# Altium PCB calculator.PcbDoc
Units mm, origin at the board's own origin, x right, y up, seen from the top; angles counter-clockwise.
Board outline 152.4 x 101.6 mm, 2 copper layers (Top Layer, Bottom Layer); 20 components, 25 nets, 107 pads, 16 vias.
Unrouted connection lines stored in the file: 7.
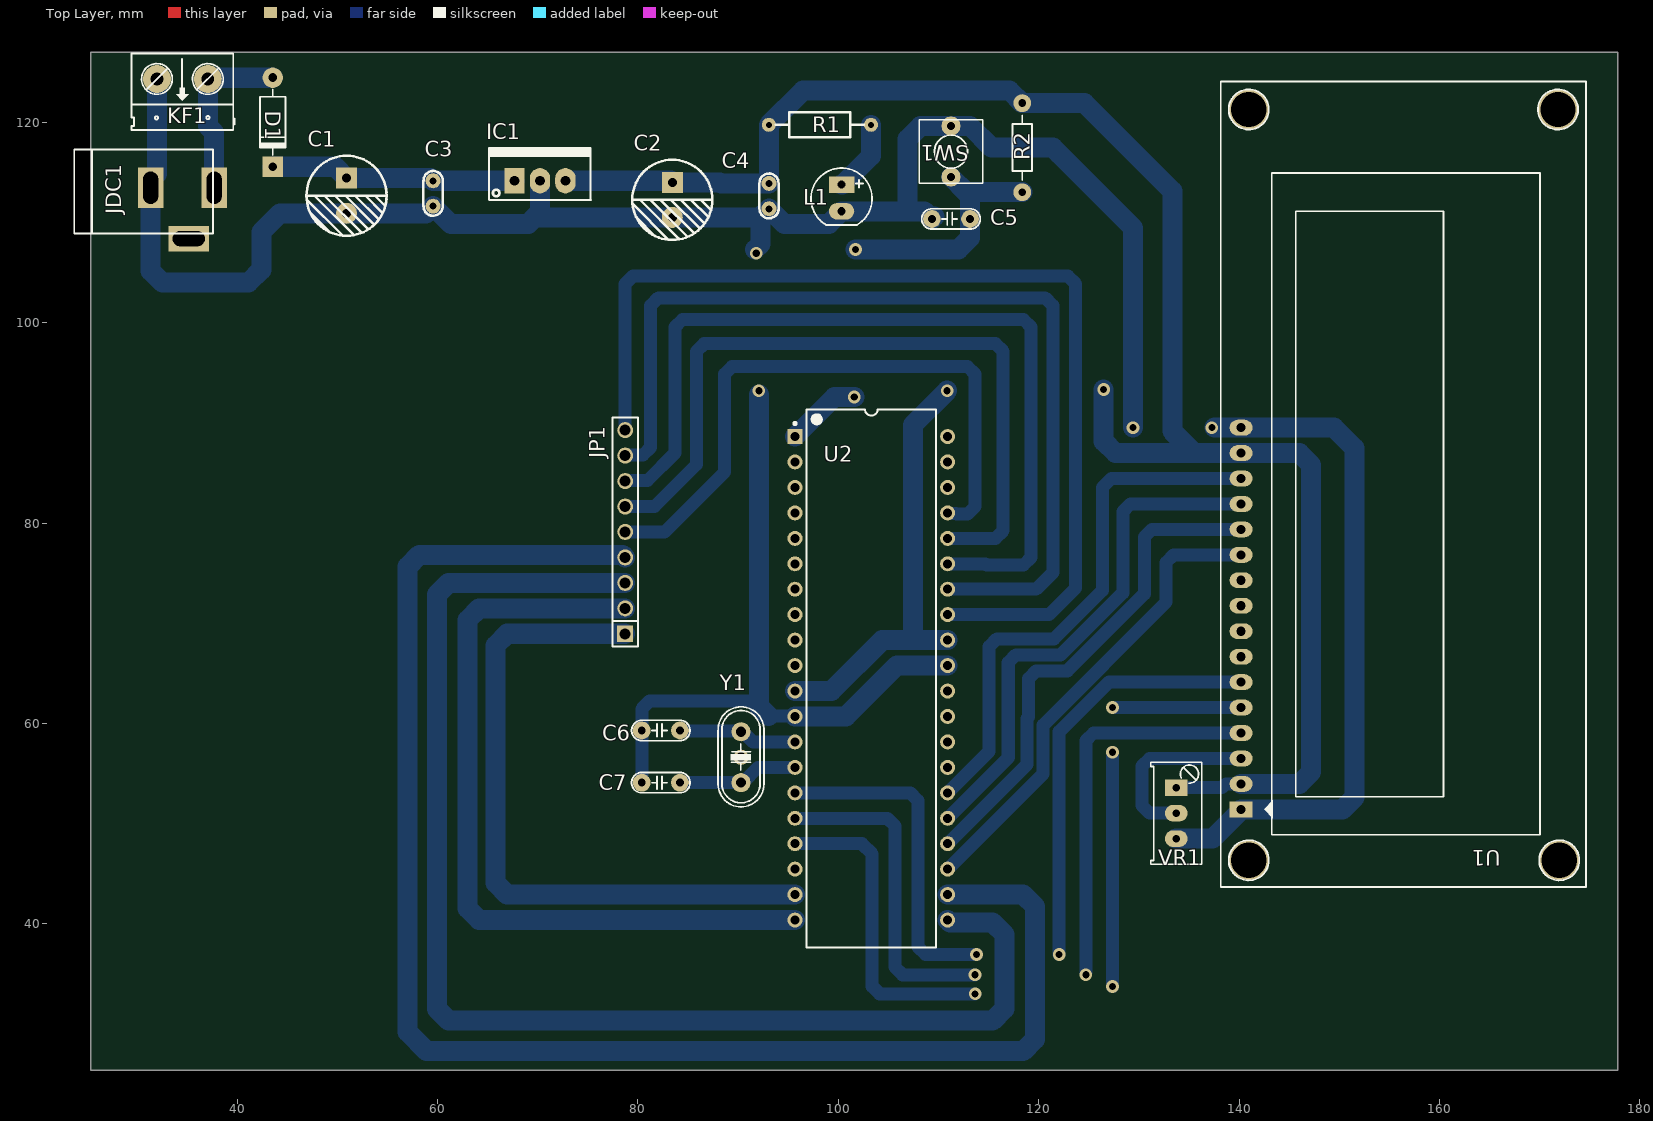
[diagram p0: Top Layer view]
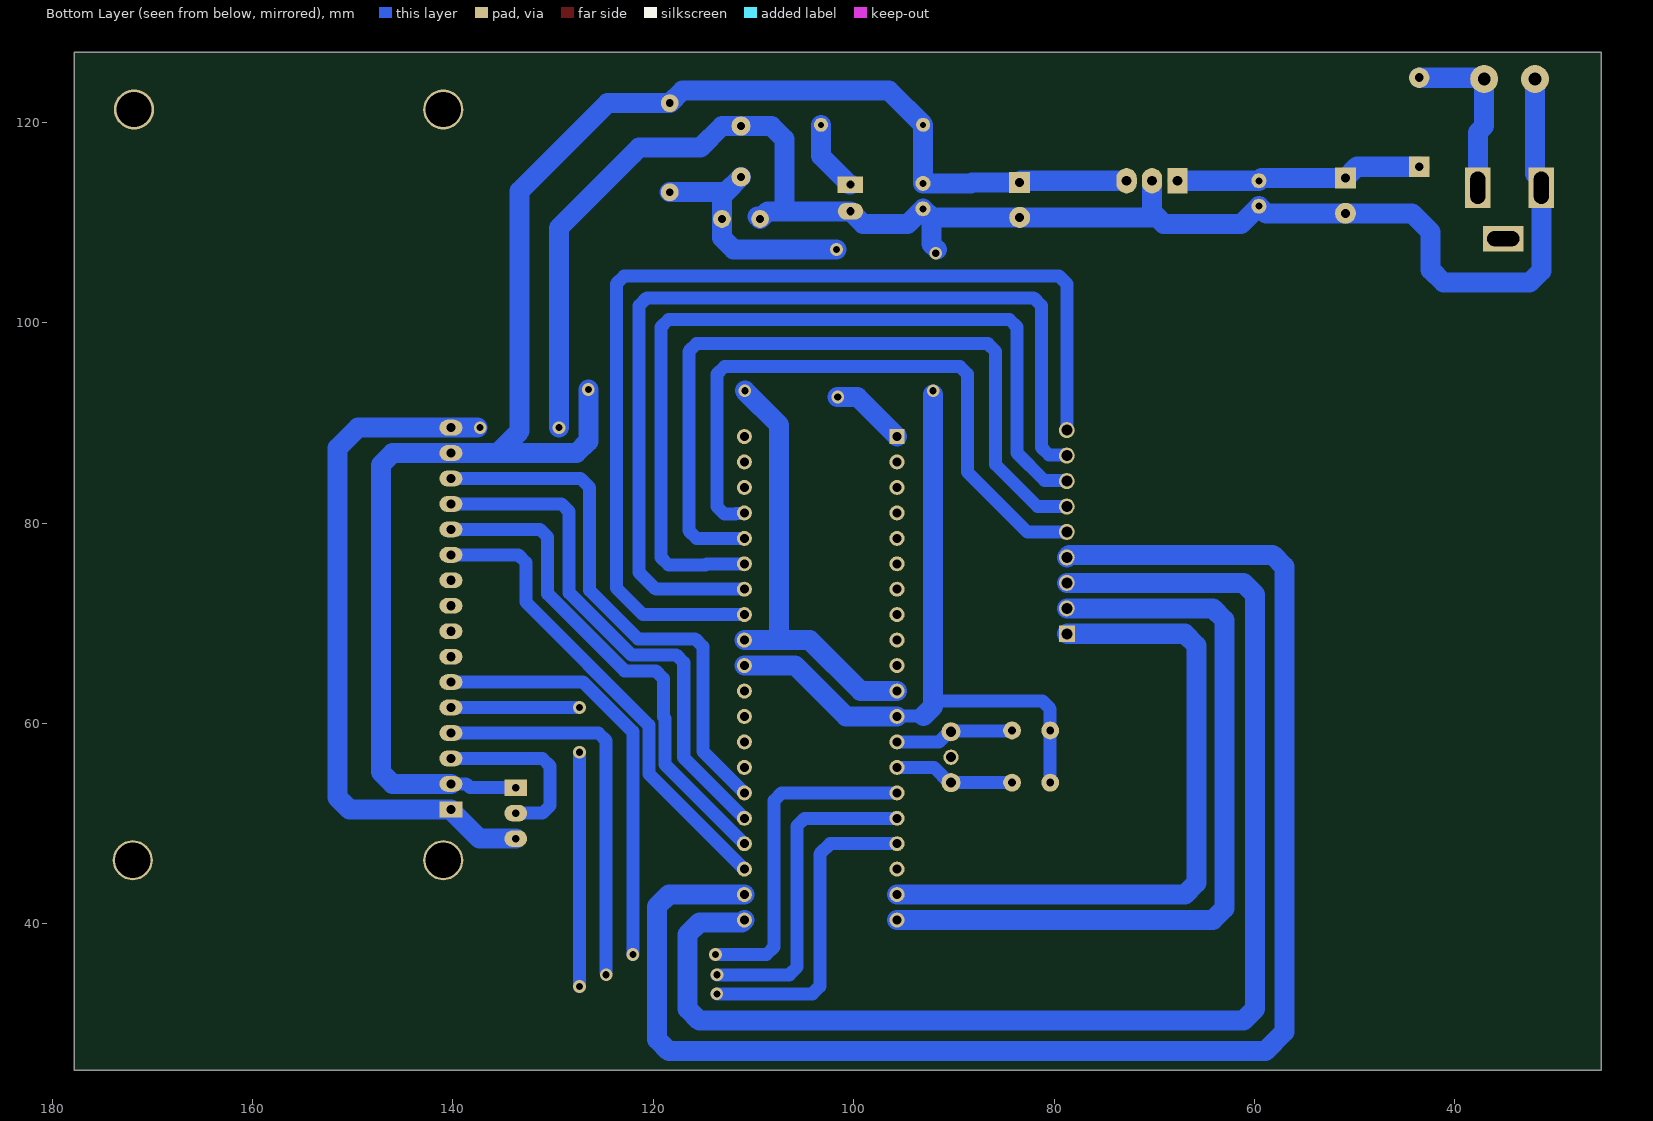
[diagram p1: Bottom Layer view, seen from below]
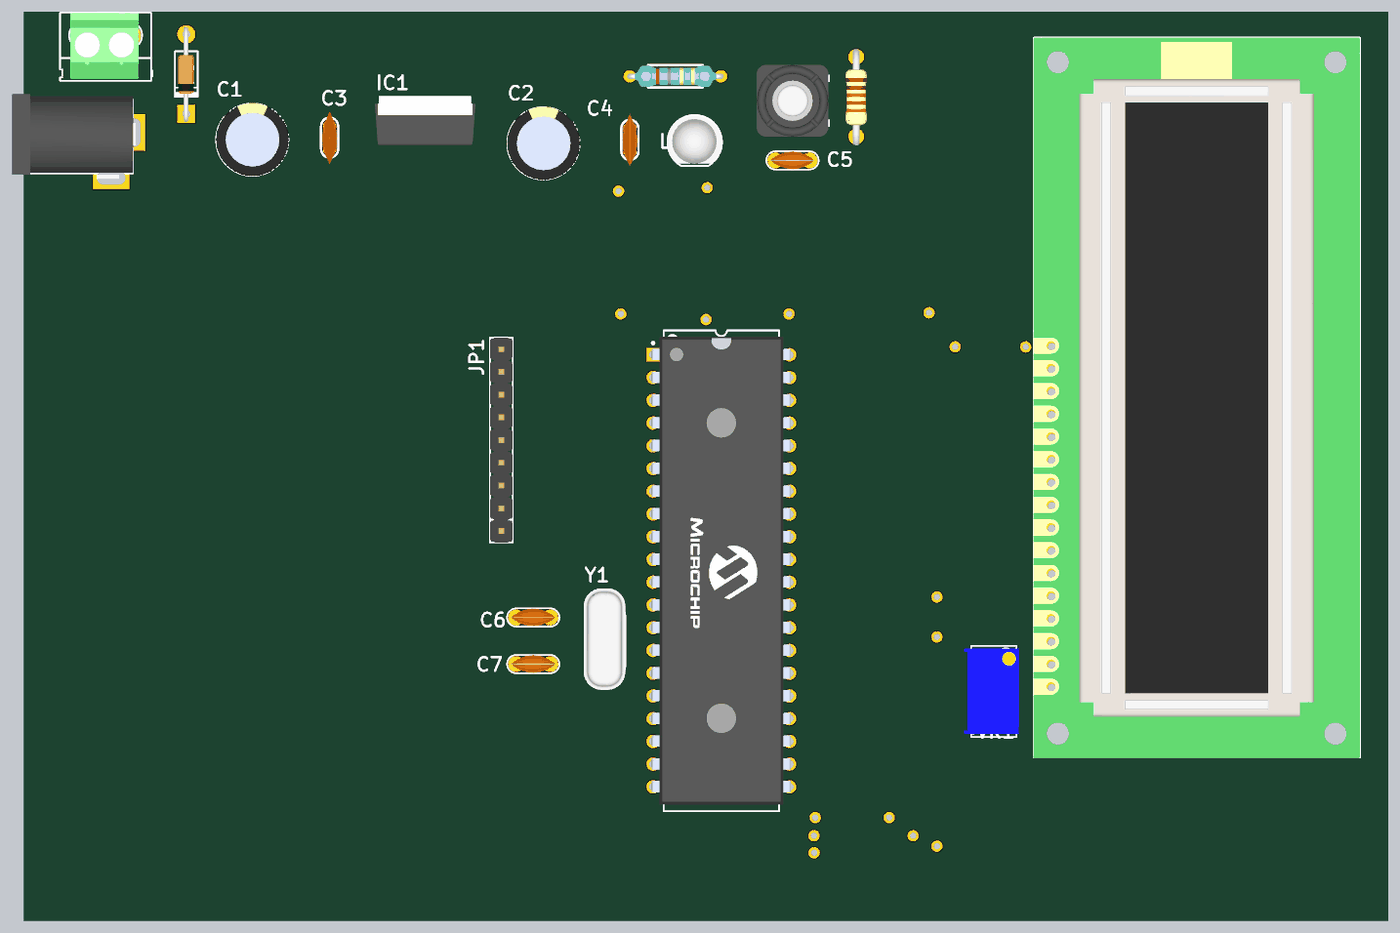
[diagram p2: 3D render of the assembled board from above, using the file's embedded part models]

## Layer stack, top to bottom
Top Solder: solder mask 0.0102, Solder Resist, Dk 3.5
Top Layer: signal copper 0.0356
Dielectric 1: dielectric 0.32, FR-4, Dk 4.8
Bottom Layer: signal copper 0.0356
Bottom Solder: solder mask 0.0102, Solder Resist, Dk 3.5

## Board outline
25.4,25.4 177.8,25.4 177.8,127 25.4,127

## Design rules (kind name [scope] priority, off if disabled: settings)
Clearance [All] p1: gap=0.3 ignorepadtopadclearanceinfootprint=FALSE
PolygonConnect [All] p1: connectstyle=Relief reliefconductorwidth=0.254 reliefentries=4 polygonreliefangle="90 Angle" airgapwidth=0.254
RoutingVias [All] p1: holewidth=0.711 width=1.27 viastyle="Through Hole" minholewidth=0.711 minwidth=1.27 maxholewidth=0.711 maxwidth=1.27
SolderMaskExpansion [All] p1: expansion=0.102 istentingtop=FALSE
SupplyNets "Schematic Supply Nets_2" [InNet('+5')] p1: voltage=0.000
SupplyNets "Schematic Supply Nets_1" [InNet('+9')] p2: voltage=0.000
SupplyNets "Schematic Supply Nets" [InNet('GND')] p3: voltage=0.000
Width 9V [All] p1: maxlimit=2 minlimit=0.8 preferedwidth=1.3
Width GND [All] p2: maxlimit=2 minlimit=0.8 preferedwidth=1.2
Width Width_1 [All] p3: maxlimit=1.5 minlimit=0.8 preferedwidth=1.2
Width 5V [All] p4: maxlimit=2 minlimit=0.8 preferedwidth=1.2
30 further rules are at their usual default settings.

## Classes and differential pairs
component class minhhuySCH: C1 C2 C3 C4 C5 D1 IC1 JDC1 JP1 KF1 L1 R1 R2 SW1 U1 U2 VR1 Y1

## Components (designator, comment, footprint, x,y, rotation, side; value= is the part's Value field where it differs from the comment)
C1 "1000uF" "tu hoa 8mm" 50.927,112.677 r270 top
C2 "1000uF" "tu hoa 8mm" 83.439,112.268 r270 top
C3 "104" "tu gom" 59.563,112.903 r270 top
C4 "104" "tu gom" 93.091,112.649 r270 top
C5 "104" CN1.5 109.347,110.363 r0 top value=0.01uF
C6 "22pF" CN1.5 80.391,59.309 r0 top value=0.01uF
C7 "22pF" CN1.5 80.391,54.102 r0 top value=0.01uF
D1 "1N4007" D1A 43.561,124.46 r90 top
IC1 "LM7805" QTO-220 67.691,114.173 r0 top
JDC1 "Jac DC" DC-IN 34.544,110.935 r0 top
JP1 "JP 1x9 2.54" "JP 1x9 DT" 78.74,68.961 r90 top
KF1 "CON 2 KF301" "Con 2 KF301 5.08" 37.084,124.333 r180 top
L1 "LED 5mm" LED-5MM-Green 100.33,113.665 r270 top
R1 "1k" "tro vach 1/4w" 98.171,119.761 r180 top
R2 "10k" R1/4W 118.364,113.03 r90 top value="R1/4W - 1K"
SW1 "SW" SW2 111.252,114.554 r90 top value="SW chip 2 pin"
U1 "LCD" LCD16X2 140.208,51.435 r90 top value=LCD16x2
U2 "PIC16F877A-E/P_1" PDIP600-P40 103.304,64.548 r270 top
VR1 "10K" VR1 133.731,53.594 r270 top value="VR 10K"
Y1 "8MHz" XT2 90.297,56.642 r270 top

## Footprints (in the part's own frame and the unit in brackets; to place one, negate y for a bottom-side part, rotate by r counter-clockwise, add the part's x,y. Pads: shape width x height; smd on the part's side, far side on the other; paste and mask are expansions set on the pad)
CN1.5 [mil]
  round 70 hole 31: 1(0,0) 2(150,0)
  silkscreen extent -40,-40 190,40, body extent -22,-39 172,40, height 254
"Con 2 KF301 5.08" [mil]
  round 110 hole 50: 1(0,0) 2(200,0)
  silkscreen extent -106,-100 300,200, body extent -45,-97 255,190, height 335
D1A [mil] "Diode 1A, W 100mil, L 350mil"
  round 80 hole 35: 1(0,0)
  rect 80x80 hole 35: 2(-350,0)
  silkscreen extent -305,-50 -45,50, body extent -386,-33 34,36, height 84
DC-IN [mm] "Jac DC input"
  rect 2.54x4.064 hole 1.5 slot 3.2 at 90 deg: 1(3.175,2.54) 2(-3.175,2.54)
  rect 4.064x2.54 hole 1.5 slot 3.2 at 0 deg: 3(0.635,-2.54)
  silkscreen extent -10.79,-2.03 3.05,6.35, body extent -10.42,-2.67 3.4,6.84, height 11.02
"JP 1x9 DT" [mm] "9 pins, 1 row, straight, gold plating"
  rect 1.6x1.6 hole 1.1: 1(0,0)
  round 1.6 hole 1.1: 2(2.54,0) 3(5.08,0) 4(7.62,0) 5(10.16,0) 6(12.7,0) 7(15.24,0) 8(17.78,0) 9(20.32,0)
  silkscreen extent -1.27,-1.27 21.59,1.27, body extent -1.27,-1.27 21.59,1.27, height 8.54
LCD16X2 [mil] "LCD dipslay 16x2, 16 pin"
  rect 62x90 hole 36: 1(0,0)
  oval 62x90 hole 36: 2(100,0) 3(200,0) 4(300,0) 5(400,0) 6(500,0) 7(600,0) 8(700,0) 9(800,0) 10(900,0) 11(1000,0) 12(1100,0) 13(1200,0) 14(1300,0) 15(1400,0) 16(1500,0)
  round 157.48 hole 137.8: "Hole 0"(-200,-30) "Hole 0"(-200,-1250) "Hole 0"(2750,-1245) "Hole 0"(2750,-30)
  silkscreen extent -305,-1355 2860,80, body extent -309,-1355 2860,82, height 414
LED-5MM-Green [mil] "LED 2 PIN, 5 ly , Only colour,pin to pin 100mil"
  rect 65x100 hole 32: 1(-5,0)
  oval 65x100 hole 32: 2(100,0)
  silkscreen extent -70,-120 154,120, body extent -69,-120 145,117, height 339
PDIP600-P40 [mm] "DIP, 40-Leads, Row Spacing 15.24mm, Pitch 2.54mm, Body 51.8x13.5mm"
  rect 1.5x1.5 hole 0.9: 1(-24.098,-7.62)
  round 1.5 hole 0.9: 2(-21.558,-7.62) 3(-19.018,-7.62) 4(-16.478,-7.62) 5(-13.938,-7.62) 6(-11.398,-7.62) 7(-8.858,-7.62) 8(-6.318,-7.62) 9(-3.778,-7.62) 10(-1.238,-7.62) 11(1.302,-7.62) 12(3.842,-7.62) 13(6.382,-7.62) 14(8.922,-7.62) 15(11.462,-7.62) 16(14.002,-7.62) 17(16.542,-7.62) 18(19.082,-7.62) 19(21.622,-7.62) 20(24.162,-7.62) 21(24.162,7.62) 22(21.622,7.62) 23(19.082,7.62) 24(16.542,7.62) 25(14.002,7.62) 26(11.462,7.62) 27(8.922,7.62) 28(6.382,7.62) 29(3.842,7.62) 30(1.302,7.62) 31(-1.238,7.62) 32(-3.778,7.62) 33(-6.318,7.62) 34(-8.858,7.62) 35(-11.398,7.62) 36(-13.938,7.62) 37(-16.478,7.62) 38(-19.018,7.62) 39(-21.558,7.62) 40(-24.098,7.62)
  silkscreen extent -26.82,-7.74 26.88,6.45, body extent -26.13,-7.76 26.13,7.77, height 3.87
QTO-220 [mil] "TO-220 - 1-2-3"
  rect 80x100 hole 39: 1(0,0)
  oval 80x100 hole 39: 2(100,0) 3(200,0)
  silkscreen extent -100,-76 300,130, body extent -121,-85 321,100, height 755
R1/4W [mil] "R 1/4W, 2 Pin, 350mil"
  round 70 hole 31: 1(0,0) 2(350,0)
  silkscreen extent 48,-38 302,38, body extent -40,-47 386,47, height 111
SW2 [mil] "SW button 2pin, 250x 250 mil"
  round 75 hole 31: 1(0,0) 2(200,0)
  silkscreen extent -25,-125 225,125, body extent -60,-163 255,157, height 257
"tro vach 1/4w" [mm]
  round 1.4 hole 0.6: 1(-5.1,0) 2(5.1,0)
  silkscreen extent -4.39,-1.25 4.42,1.25, body extent -5.38,-1.2 5.38,1.2, height 2.41
"tu gom" [mm] "Tu gom mini"
  round 1.5 hole 0.7: 1(-1.27,0) 2(1.27,0)
  silkscreen extent -2.25,-0.97 2.22,0.97, body extent -2.92,-0.85 2.92,0.85, height 6.12
"tu hoa 8mm" [mm]
  rect 2.1x2.1 hole 0.9: 1(-1.75,0)
  round 2.1 hole 0.9: 2(1.75,0)
  silkscreen extent -4,-4 4,4, body extent -4.1,-4.07 4.1,4.13, height 13.81
VR1 [mil] "Variable Resistor"
  rect 65x90 hole 30: 1(0,0)
  oval 65x90 hole 30: 2(100,0) 3(200,0)
  silkscreen extent -100,-100 301,100, body extent -88,-130 288,110, height 455
XT2 [mm] "Footpin for Crystal 2 pin"
  round 1.524 hole 1: 0(0,0)
  round 1.905 hole 1: 1(-2.54,0) 2(2.54,0)
  silkscreen extent -5.03,-2.29 4.96,2.29, body extent -5.93,-2.36 5.42,2.29, height 3.5

## Part data
C1 C2: library part "Tu Hoa 1000uF 16V 8x20", "Cắm", Chung_Loai=Cắm, Don_Vi=Con, Ma_Hang=MH008300, So_Chan=2, Ten_Linh_Kien="Tụ Hóa 1000uF 16V 8x20MM"
C3 C4: library part "Tu gom 104 50V", "Cắm", Chung_Loai=Cắm, Don_Vi=Con, Ma_Hang=MH004761, So_Chan=2, Ten_Linh_Kien="Tụ gốm 104 100nF 50V"
C5 C6 C7: library part CN1.5, "Cap np 682pF => 104pF"
D1: library part D1A, "Diode 1A"
IC1: library part LM78xx, "On ap +, from + 5 to + 24VDC"
JDC1: library part DCIN, "Jac DC input"
JP1: library part "JP 1x9 2.54 Duc Thang", "Cắm", Chung_Loai=Cắm, Don_Vi=Con, Ma_Hang=MH000903, Ten_Linh_Kien="Jump Đơn Đực 2.54MM 1x40P Thẳng 11MM"
KF1: "Cắm", Chung_Loai=Cắm, Don_Vi=Con, Ma_Hang=MH000987, Ten_Linh_Kien="CON 2 KF301-2P 5.08MM Xanh Dương"
L1: library part "LED 5mm Xanh La", "Cắm", Chung_Loai=Cắm, Don_Vi=Con, Ma_Hang=MH008969, Ten_Linh_Kien="LED 5MM Phủ Xanh (1000c)"
R1: library part "Tro Vach 1/4W 5% 1k", "Cắm", Chung_Loai=Cắm, Don_Vi=Con, Ma_Hang=MH007390, So_Chan=2, Ten_Linh_Kien="Trở Vạch 1/4w 5% 1k"
R2: library part R1/4W, "Resistor 1/4W"
SW1: library part SW2, "Switch button 2 pin"
U2: "Enhanced FLASH Microcontroller, 8K (x14-Bit words) FLASH, 368 Bytes RAM, 40-Pin PDIP, Standard VDD Range, Extended Temperature", Supplier Part Number 1=PIC16F877A-E/P-ND, ComponentAvailability="Unknown. Contact manufacturer to determine status.", ComponentLink1Description=Datasheet, ComponentLink1URL=http://ww1.microchip.com/downloads/en/DeviceDoc/39582b.pdf, ComponentLink2Description="Packaging Specification", ComponentLink2URL=http://www.microchip.com/stellent/groups/techpub_sg/documents/packagingspec/en012702.pdf, ComponentLink3Description="Microchip.com Home", ComponentLink3URL=http://www.microchip.com/, DatasheetVersion="revB, Oct-2003", LatestRevisionDate=29-Jan-2009, LatestRevisionNote="Sch. layout revised. 3D Model Removed.", PackageDescription="40-Lead Plastic Dual In-Line (P) - 600 mil Body [PDIP]", PackageReference=PDIP600-P40, PackageVersion="revBB, Aug-2009", Published=11-Oct-2004, Publisher="Altium Limited", Supplier 1=Digi-Key, Supplier 2=Farnell, Supplier Part Number 2=1567990
VR1: library part VR1, "Var Resistor"
Y1: library part Crystal, "Crystal Oscillator", LatestRevisionDate=17-Jul-2002, LatestRevisionNote="Re-released for DXP Platform.", PackageReference=R38, Published=8-Jun-2000, Publisher="Altium Limited"

## Via types
v1: diameter 1.27, hole 0.711, Top Layer to Bottom Layer, 16 vias

## Nets (pads, with @x,y where several pads share a name; then routed paths per layer and width w, separated by ;. In a path a pad name is that pad's centre, name@x,y a point inside that pad or via, vN(x,y) a via of type N, cw(c..) or ccw(c..) an arc to the next point about the centre after c; other vN are vias at no path point)
+5: C2.1 C4.1 IC1.3 R1.2 R2.2 U1.2 U1.15 U2.11 U2.32 VR1.1 | length 214.5
  Bottom Layer w1.3: VR1.1 138.303,53.594 138.684,53.975 U1.2
  Bottom Layer w2: IC1.3 83.284,114.173 C2.1 88.215,114.018 88.314,113.919 C4.1 93.071,113.939 R1.2 96.5,123.19 117.094,123.19 R2.2 124.587,121.92 133.35,113.157 133.35,89.183 135.538,86.995 ; U2.11 99.314,63.246 104.394,68.326 107.442,68.326 ; v1(110.871,93.218) 107.442,89.789 107.442,68.326 ; U2.32 107.442,68.326 ; v1(126.492,93.345) 126.492,88.167 127.664,86.995 135.538,86.995 ; U1.2 146.021,53.975 147.193,55.147 147.193,85.823 146.021,86.995 U1.15 135.538,86.995
+9: C1.1 C3.1 D1.2 IC1.1 | length 24.7
  Bottom Layer w2: D1.2 49.784,115.57 C1.1 59.309,114.427 C3.1 IC1.1
/RESET: C5.2 R2.1 SW1.1 U2.1 | length 31.9
  Bottom Layer w2: U2.1 99.621,92.583 v1(101.6,92.583) ; v1(101.727,107.315) 111.985,107.315 113.157,108.487 C5.2 113.157,112.649 112.776,113.03 ; SW1.1 112.776,113.03 ; R2.1 112.776,113.03
GND: C1.2 C2.2 C3.2 C4.2 C5.1 C6.1 C7.1 IC1.2 JDC1.2 KF1.2 L1.2 SW1.2 U1.1 U1.16 U2.12 U2.31 VR1.3 | length 309.4
  Bottom Layer w1.3: C7.1 C6.1 80.391,61.468 81.153,62.23 91.567,62.23 92.075,61.722 ; 93.053,60.744 95.646,60.744 U2.12
  Bottom Layer w2: KF1.2 32.004,114.872 31.369,114.237 JDC1.2 31.369,105.185 32.541,104.013 41.148,104.013 42.418,105.283 42.418,109.064 44.281,110.927 C1.2 58.857,110.927 C3.2 61.341,109.855 69.059,109.855 69.722,110.518 ; IC1.2 70.231,111.027 69.722,110.518 ; v1@91.694,107.315 92.23,107.851 92.23,110.518 ; v1@92.075,92.837 92.075,61.722 93.053,60.744 ; U2.12 100.764,60.706 105.844,65.786 U2.31 ; C5.1@109.601,110.617 C5.1 108.585,111.125 106.934,111.125 ; v1(129.413,89.535) 129.413,109.474 122.046,116.841 121.412,117.475 115.316,117.475 113.157,119.634 SW1.2 108.233,119.634 106.934,118.335 106.934,111.125 ; VR1.3 137.357,48.514 140.208,51.365 U1.1 150.339,51.435 151.511,52.607 151.511,87.503 149.479,89.535 U1.16 v1@137.541,89.535 ; 69.722,110.518 C2.2 92.23,110.518 ; 92.23,110.518 C4.2 94.615,109.855 99.06,109.855 L1.2 106.934,111.125
  other v1: 137.287,89.535 92.075,93.218 91.821,106.934
NetD1_1: D1.1 JDC1.1 KF1.1 | length 17.7
  Bottom Layer w2: JDC1.1 37.719,118.995 37.084,119.63 KF1.1 37.205,124.454 43.555,124.454 D1.1
NetL1_1: L1.1 R1.1 | length 7.2
  Bottom Layer w2: L1.1 100.425,113.792 103.271,116.638 R1.1
NetU1_3: U1.3 VR1.2 | length 17.9
  Bottom Layer w1.3: VR1.2 131.064,51.054 130.302,51.816 130.302,55.753 131.064,56.515 U1.3
OSC1: C6.2 U2.13 Y1.1 | length 12
  Bottom Layer w1.3: C6.2 84.264,59.245 90.233,59.245 Y1.1 90.461,59.182 91.477,58.166 U2.13
OSC2: C7.2 U2.14 Y1.2 | length 12.1
  Bottom Layer w1.3: C7.2 Y1.2 90.461,54.102 91.985,55.626 U2.14
RB0: JP1.9 U2.33 | length 104.4
  Bottom Layer w1.3: JP1.9 78.74,103.886 79.502,104.648 122.936,104.648 123.698,103.886 123.698,73.533 121.031,70.866 U2.33
RB1: JP1.8 U2.34 | length 95.7
  Bottom Layer w1.3: JP1.8 78.797,86.798 80.518,86.798 81.28,87.56 81.28,101.727 82.042,102.489 120.65,102.489 121.412,101.727 121.412,75.057 119.761,73.406 U2.34
RB2: JP1.7 U2.35 | length 86.6
  Bottom Layer w1.3: JP1.7 78.797,84.258 80.956,84.258 83.693,86.995 83.693,99.568 84.455,100.33 118.491,100.33 119.253,99.568 119.253,76.581 118.491,75.819 114.798,75.819 114.671,75.946 U2.35
RB3: JP1.6 U2.36 | length 75.1
  Bottom Layer w1.3: JP1.6 81.661,81.661 85.852,85.852 85.852,97.155 86.614,97.917 115.697,97.917 116.459,97.155 116.459,79.248 115.697,78.486 U2.36
RB4: JP1.5 U2.37 | length 64.1
  Bottom Layer w1.3: JP1.5 82.677,79.121 88.646,85.09 88.646,94.869 89.408,95.631 112.903,95.631 113.665,94.869 113.665,81.661 112.903,80.899 111.827,80.899 111.738,80.988 110.962,80.988 U2.37
RC0: U1.6 U2.15 | length 75.8
  Bottom Layer w1.3: U2.15 107.188,53.086 107.95,52.324 107.95,37.719 108.712,36.957 v1(113.792,36.957) ; v1(122.047,36.957) 122.047,59.182 127,64.135 U1.6
RC1: U1.4 U2.16 | length 71.6
  Bottom Layer w1.3: U2.16 104.902,50.546 105.664,49.784 105.664,35.687 106.426,34.925 v1(113.648,34.925) ; v1@124.714,35.179 124.714,58.293 125.476,59.055 U1.4
  other v1: 124.714,34.925
RC2: U1.5 U2.17 | length 44.5
  Bottom Layer w1.3: U2.17 102.362,48.006 103.378,46.99 103.378,33.782 104.14,33.02 v1(113.665,33.02) ; v1@127.635,61.595 U1.5
  other v1: 127.381,61.595
RC4: U1.11 U2.23 | length 47.4
  Bottom Layer w1.3: U2.23 120.447,54.989 120.447,59.845 132.715,72.113 132.715,76.073 133.477,76.835 U1.11
RC5: U1.12 U2.24 | length 50.5
  Bottom Layer w1.3: U2.24 118.847,55.929 118.847,60.507 118.999,60.659 118.999,64.491 119.761,65.253 122.864,65.253 130.556,72.945 130.556,78.613 131.318,79.375 U1.12
RC6: U1.13 U2.25 | length 52.6
  Bottom Layer w1.3: U2.25 116.967,56.589 116.967,66.091 117.729,66.853 122.202,66.853 128.397,73.048 128.397,81.153 129.159,81.915 U1.13
RC7: U1.14 U2.26 | length 54.4
  Bottom Layer w1.3: U2.26 115.062,57.224 115.062,67.691 115.824,68.453 121.539,68.453 126.365,73.279 126.365,83.566 127.254,84.455 U1.14
RD0: JP1.1 U2.19 | length 67.5
  Bottom Layer w2: JP1.1 66.958,68.961 65.786,67.789 65.786,44.098 66.958,42.926 U2.19
RD1: JP1.2 U2.20 | length 78.2
  Bottom Layer w2: JP1.2 64.164,71.501 62.992,70.329 62.992,41.558 64.164,40.386 U2.20
RD2: JP1.3 U2.21 | length 131.9
  Bottom Layer w2: JP1.3 61.116,74.041 59.944,72.869 59.944,31.525 61.116,30.353 115.414,30.353 116.586,31.525 116.586,38.96 115.414,40.132 111.178,40.132 U2.21
RD3: JP1.4 U2.22 | length 155.1
  Bottom Layer w2: JP1.4 78.486,76.835 58.195,76.835 57.023,75.663 57.023,29.21 58.928,27.305 118.462,27.305 119.634,28.477 119.634,41.754 118.462,42.926 U2.22
pads on no net: "U1.Hole 0" JDC1.3 U1.7 U1.8 U1.9 U1.10 U2.2 U2.3 U2.4 U2.5 U2.6 U2.7 U2.8 U2.9 U2.10 U2.18 U2.27 U2.28 U2.29 U2.30 U2.38 U2.39 U2.40 Y1.0
copper on no net: | length 23.4
  Bottom Layer w1.3: v1(127.381,33.763) v1(127.381,57.131)